# EAGLE board MPPT_power (EAGLE 7.4.0)
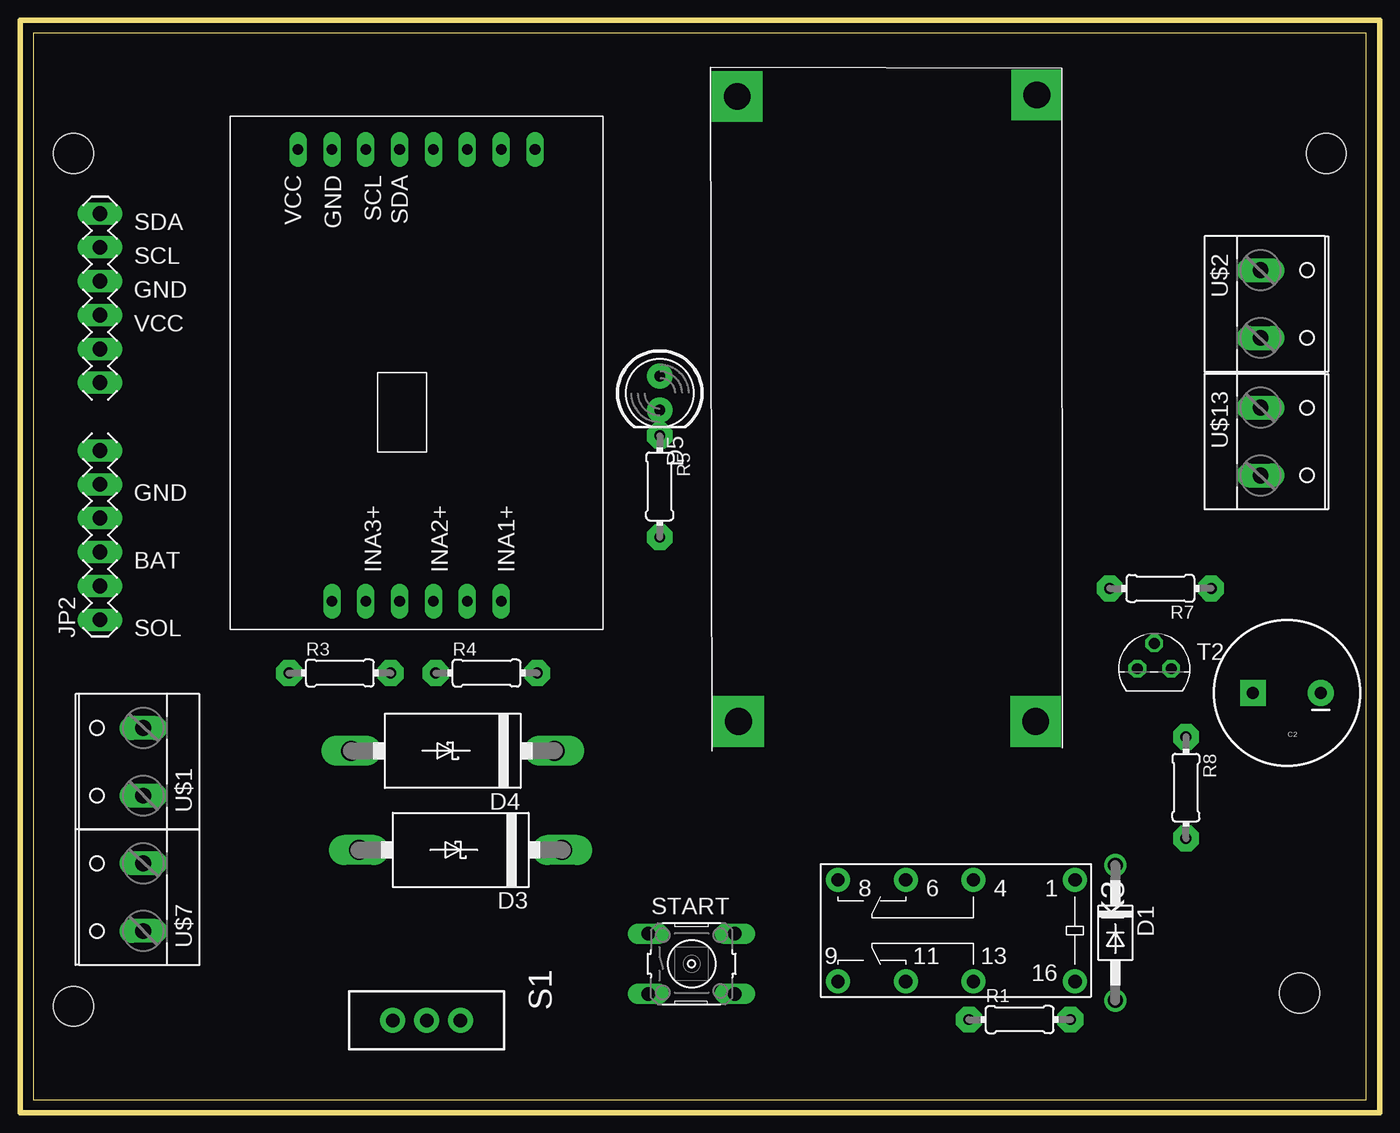
[diagram p0: board, top side]
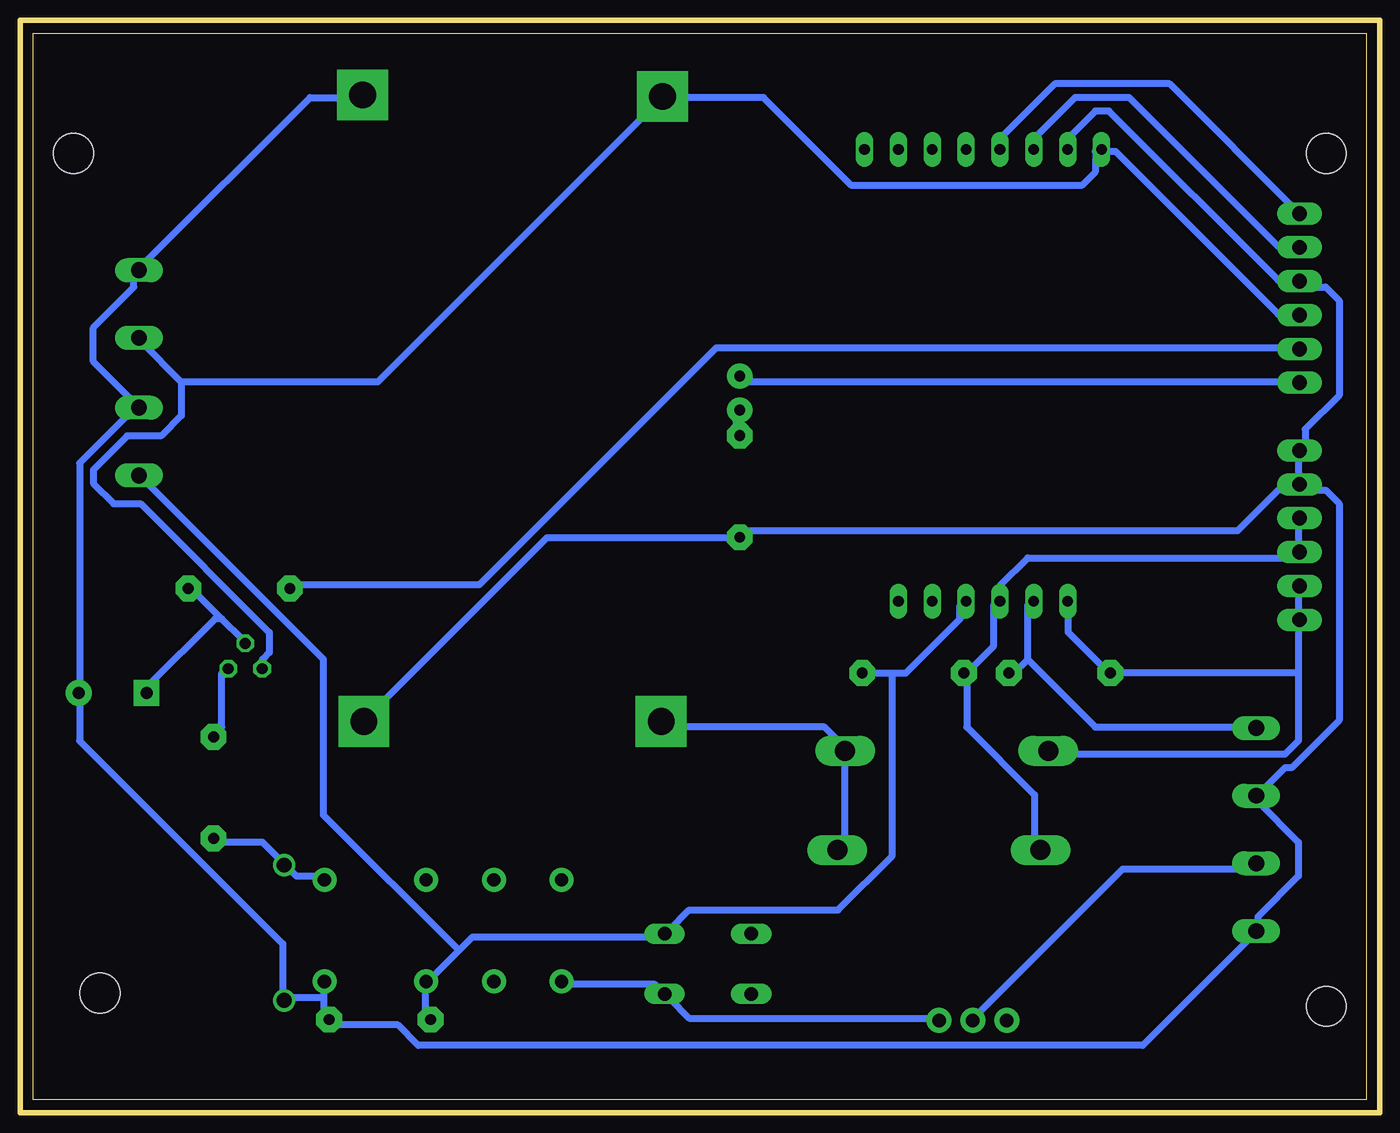
[diagram p1: board, bottom side, seen from below]

Size 100 x 80 mm. Coordinates in mm from the lower left corner, seen from the top.
Outline: 0,0 100,0 100,80 0,80 0,0
Copper layers (1*16): Top 0.035mm / dielectric 1.5mm / Bottom 0.035mm
Design rules "PCBMilling": minimum track width 20mil, minimum drill 24mil, track to track 20mil, track to pad 20mil, pad to pad 8mil, via to via 8mil, smd to smd 8mil, copper to edge 40mil, drill to drill 8mil, minimum pad ring 10mil, minimum via ring 8mil, stop-mask expansion 4mil, vias tented up to drill 0mil, thermal gap 10mil
Holes 3 mm at 3,7 3,71 97,71 95,8
Milling: 4 lines

## Footprints (pad centres in the part's own frame; a part is rotated, then mirrored left to right if it is on the bottom)
CPOL-RADIAL-1000UF-25V = drill 0.9 pad 1.93 square: + 2.54,0 | drill 0.9 pad 1.93: - -2.54,0
DO41-10 = drill 1.118: A 5.08,0; C -5.08,0
DO201T15 = drill 1.499 long: A 7.62,0; C -7.62,0
LED5MM = drill 0.813 pad 1.88: A -1.27,0; K 1.27,0
M06_PLUS_06_MPPT = drill 1.118 long: 1 0,0; 2 2.54,0; 3 5.08,0; 4 7.62,0; 5 10.16,0; 6 12.7,0; 8 17.78,0; 9 20.32,0; 10 22.86,0; 11 25.4,0; 12 27.94,0; 13 30.48,0
G5V-2 = drill 1 pad 1.8: 1 -8.89,-3.81; 4 -1.27,-3.81; 6 3.81,-3.81; 8 8.89,-3.81; 9 8.89,3.81; 11 3.81,3.81; 13 -1.27,3.81; 16 -8.89,3.81
0204/7 = drill 0.813 pad 1.93 octagon: 1 -3.81,0; 2 3.81,0
SWITCH-SPDT = drill 1.016 pad 1.88: 1 0,2.54; 2 0,0; 3 0,-2.54
B3F-10XX = drill 1.016 long: 1 -3.251,2.261; 2 3.251,2.261; 3 -3.251,-2.261; 4 3.251,-2.261
TO92 = drill 0.813 octagon: 1 1.27,0; 2 0,1.905; 3 -1.27,0
W237-132 = drill 1.194 long: 1 -2.54,-0.635; 2 2.54,-0.635
DROK_BUCKCONV_TWOSTORY_PADS = drill 2 pad 3.81 square: GND_IN -22.13,-10.7; GND_OUT 24.87,-10.8; IN -22.13,11.6; OUT 24.77,11.7
SWITCHDOC_INA3221_NODRILL = drill 0.8 long: 1 -15.28,-10.14; 2 -15.28,-7.6; 3 -15.28,-5.06; 4 -15.28,-2.52; 5 -15.28,0.02; 6 -15.28,2.56; 7 -15.28,5.1; 8 -15.28,7.64; 9 18.62,-7.6; 10 18.62,-5.06; 11 18.62,-2.52; 12 18.62,0.02; 13 18.62,2.56; 14 18.62,5.1

## Placement (x,y rotation side)
C2  1000uF  [CPOL-RADIAL-1000UF-25V]  94.05,30.51 180 top
D1  1N4004  [DO41-10]  81.18,12.51 270 top
D3  1N5822  [DO201T15]  32.06,18.73 180 top
D4  1N5822  [DO201T15]  31.47,26.16 180 top
D5  [LED5MM]  47,53 270 top
JP2  [M06_PLUS_06_MPPT]  5,36 90 top
K3  5V  [G5V-2]  69.26,12.67 180 top
R1  100K  [0204/7]  74,6 0 top
R3  0.1  [0204/7]  23,32 0 top
R4  0.1  [0204/7]  34,32 0 top
R5  10K  [0204/7]  47,46 270 top
R7  100  [0204/7]  84.56,38.35 180 top
R8  10  [0204/7]  86.48,23.4 270 top
S1  [SWITCH-SPDT]  29.51,5.94 270 top
START  START  [B3F-10XX]  49.39,10.18 0 top
T2  BC337  [TO92]  84.1,32.32 0 top
U$1  SOLAR  [W237-132]  7.62,25.34 90 top
U$2  5V  [W237-132]  92.71,59.69 270 top
U$3  [DROK_BUCKCONV_TWOSTORY_PADS]  64.5,50.5 90 top
U$7  BATT  [W237-132]  7.62,15.18 90 top
U$13  8V  [W237-132]  92.71,49.37 270 top
X1  SWITCHDOC_INA3221  [SWITCHDOC_INA3221_NODRILL]  30,56 270 top

## Library data of the parts
C2 = SparkFun-Capacitors; PROD_ID: CAP-09538
D1 = diode
D3 D4 = tmb_diode
D5 = tmb_LED
JP2 U$1 U$2 U$7 U$13 = tmb_connectors
K3 = tmb_relay; MPN: G5V-2 5DC; OC_FARNELL: 9949488; OC_NEWARK: 78K5703
R1 R3-R5 R7 R8 = tmb_resistor
S1 = SparkFun-Electromechanical; PROD_ID: SWCH-08261
START = switch-omron
T2 = transistor-neu-to92
U$3 X1 = tmb_boards

## Nets
5V: JP2.10 T2.3 U$2.2 U$3.OUT X1.1
GND: C2.- D1.A JP2.5 JP2.6 JP2.11 K3.16 R1.2 R5.2 U$1.1 U$2.1 U$3.GND_IN U$3.GND_OUT U$7.1 U$13.1 X1.2
N$1: K3.13 R1.1 R4.2 START.2 U$13.2 X1.12
N$2: D3.C D4.C U$3.IN
N$3: D5.K R5.1
N$4: D5.A JP2.8
N$5: S1.2 U$7.2
N$6: R3.2 U$1.2 X1.10
N$7: R8.1 T2.1
N$8: JP2.9 R7.2
N$9: K3.9 S1.1 START.4
N$10: C2.+ R7.1 T2.2
N$11: JP2.13 X1.4
N$12: JP2.12 X1.3
N$13: D1.C K3.1 R8.2
N$15: D3.A JP2.3 JP2.4 R4.1 X1.11
N$16: D4.A JP2.1 JP2.2 R3.1 X1.9

## Tracks (layer width: path | path; a pad name or v marks a point on that pad's centre or on a via)
5V
  Bottom 0.508: 88.9,53.85 88.9,51.31 90.42,49.78 92.96,49.78 95.5,47.24 95.5,46.23 93.98,44.7 91.95,44.7 82.3,35.05 82.3,33.53 82.8,33.02 82.8,32.51 T2.3 | 88.9,53.85 91.95,56.9 U$2.2 | JP2.10 5.08,58.93 6.6,58.93 18.8,71.12 19.81,71.12 X1.1 20.32,71.12 20.32,69.6 21.34,68.58 38.61,68.58 45.21,75.18 52.32,75.18 U$3.OUT 52.83,75.18 74.17,53.85 88.9,53.85
GND
  Bottom 0.508: 78.23,7.62 78.23,8.64 K3.16 | 78.23,7.62 78.23,6.1 R1.2 77.72,5.59 72.64,5.59 71.12,4.06 16.76,4.06 8.64,12.19 U$7.1 8.13,12.7 8.13,13.72 5.08,16.76 5.08,19.3 8.13,22.35 U$1.1 8.13,22.86 6.1,24.89 5.59,24.89 2.03,28.45 2.03,44.7 3.05,45.72 4.57,45.72 JP2.5 | 78.23,7.62 80.77,7.62 D1.A 81.28,7.62 81.28,11.68 96.52,26.92 96.52,30.48 C2.- 96.52,30.99 96.52,47.75 92.46,51.82 U$13.1 92.46,52.32 95.5,55.37 95.5,57.91 92.46,60.96 92.46,61.98 U$2.1 91.95,62.48 79.25,75.18 75.69,75.18 U$3.GND_OUT | U$3.GND_IN 75.18,28.45 61.47,42.16 47.24,42.16 R5.2 46.74,42.67 9.65,42.67 6.6,45.72 5.08,45.72 JP2.5 | JP2.5 5.08,46.23 5.08,48.26 JP2.6 4.57,48.77 4.57,50.29 2.03,52.83 2.03,59.94 3.05,60.96 4.57,60.96 JP2.11 5.08,61.47 6.6,61.47 19.3,74.17 20.32,74.17 22.35,72.14 22.35,71.63 X1.2
N$1
  Bottom 0.508: 35.56,32 37.59,32 R4.2 | 35.56,32 34.54,32 30.48,36.07 30.48,37.08 X1.12 | R1.1 70.61,6.1 70.61,8.64 K3.13 70.1,9.14 68.07,11.18 | 68.07,11.18 67.06,12.19 52.83,12.19 START.2 52.32,12.7 50.8,14.22 39.62,14.22 35.56,18.29 35.56,32 | 68.07,11.18 78.23,21.34 78.23,33.02 91.95,46.74 U$13.2
N$2
  Bottom 0.508: D3.C 39.62,18.8 39.12,19.3 39.12,25.91 D4.C 39.12,26.42 40.64,27.94 52.83,27.94 U$3.IN
N$3
  Bottom 0.508: D5.K 47.24,51.31 47.24,50.29 R5.1
N$4
  Bottom 0.508: D5.A 46.74,53.85 5.08,53.85 JP2.8
N$5
  Bottom 0.508: S1.2 29.46,6.1 18.29,17.27 8.64,17.27 U$7.2
N$6
  Bottom 0.508: 25.4,33.02 25.4,37.08 X1.10 | 25.4,33.02 26.42,32 R3.2 | 25.4,33.02 20.32,27.94 8.64,27.94 U$1.2
N$7
  Bottom 0.508: T2.1 85.85,32 85.85,27.94 86.36,27.43 R8.1
N$8
  Bottom 0.508: R7.2 80.26,38.61 66.55,38.61 48.77,56.39 5.08,56.39 JP2.9
N$9
  Bottom 0.508: K3.9 59.94,8.64 53.34,8.64 52.83,8.13 START.4 52.32,7.62 50.8,6.1 32.51,6.1 S1.1
N$10
  Bottom 0.508: 85.85,36.07 87.88,38.1 R7.1 | 85.85,36.07 84.33,34.54 T2.2 | 85.85,36.07 86.36,36.07 91.44,30.99 C2.+
N$11
  Bottom 0.508: X1.4 27.43,71.63 27.43,72.14 23.37,76.2 14.73,76.2 5.08,66.55 JP2.13
N$12
  Bottom 0.508: X1.3 24.89,71.63 24.89,72.14 21.84,75.18 17.78,75.18 6.6,64.01 5.08,64.01 JP2.12
N$13
  Bottom 0.508: R8.2 86.36,19.3 82.8,19.3 81.28,17.78 D1.C 80.77,17.27 80.26,16.76 78.23,16.76 K3.1
N$15
  Bottom 0.508: JP2.4 5.08,43.18 5.08,41.15 JP2.3 5.08,40.64 25.4,40.64 27.43,38.61 27.43,37.59 X1.11 27.94,37.08 27.94,34.04 29.97,32 R4.1 29.97,31.5 29.97,27.94 24.89,22.86 24.89,18.8 D3.A
N$16
  Bottom 0.508: X1.9 22.35,37.08 22.35,35.05 19.3,32 R3.1 18.8,32 5.08,32 | JP2.2 5.08,38.1 5.08,36.07 JP2.1 5.08,35.56 5.08,32 | 5.08,32 5.08,26.92 6.1,25.91 23.37,25.91 D4.A